# Altium PCB f30bms-slaveboard-tester.PcbDoc
Units mil, origin at the board's own origin, x right, y up, seen from the top; angles counter-clockwise.
Board outline 6000 x 4000 mil, 2 copper layers (Top Layer, Bottom Layer); 67 components, 29 nets, 109 pads, 0 vias.
Unrouted connection lines stored in the file: 11.
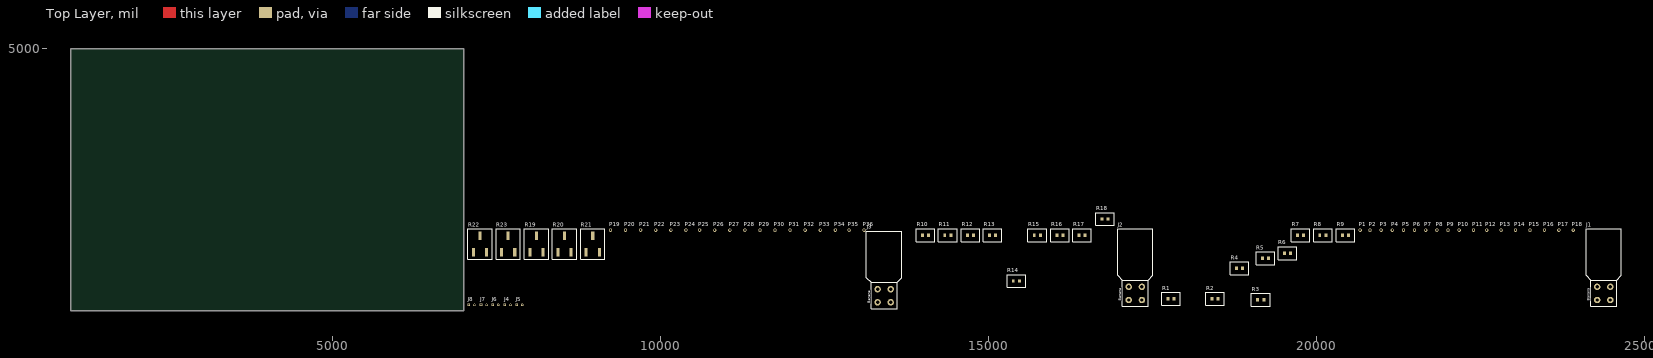
[diagram p0: Top Layer view]
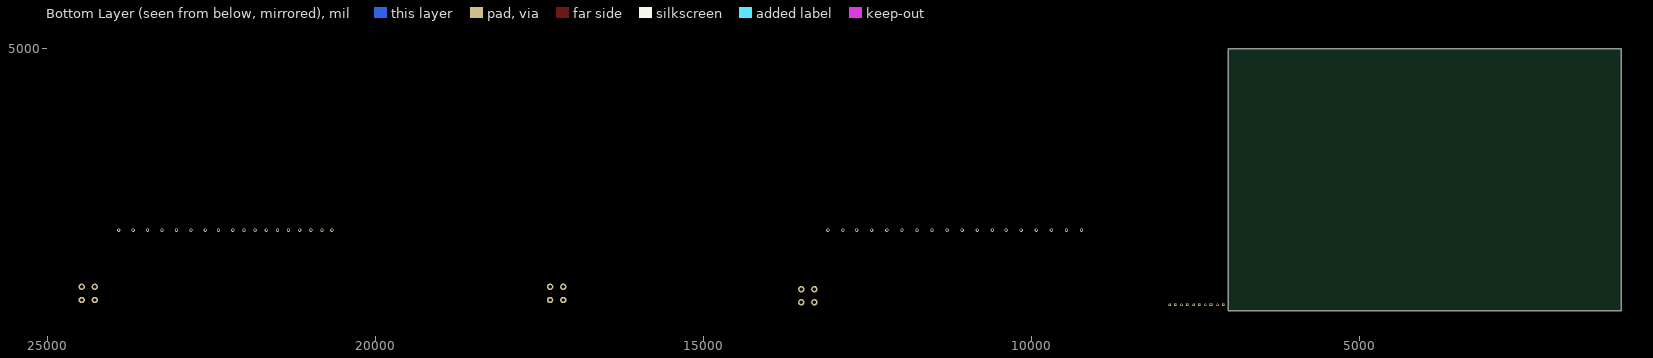
[diagram p1: Bottom Layer view, seen from below]

## Layer stack, top to bottom
Top Solder: solder mask 0.4, Solder Resist, Dk 3.5
Top Layer: signal copper 1.4
Dielectric 1: dielectric 12.6, FR-4, Dk 4.8
Bottom Layer: signal copper 1.4
Bottom Solder: solder mask 0.4, Solder Resist, Dk 3.5

## Board outline
1000,1000 7000,1000 7000,5000 1000,5000

## Design rules (kind name [scope] priority, off if disabled: settings)
Clearance [All] p1: gap=10 ignorepadtopadclearanceinfootprint=FALSE except(0: Arc-Hole Track-Hole SMDPad-Hole THPad-Hole Via-Hole Fill-Hole Poly-Hole Region-Hole Text-Hole)
PolygonConnect [All] p1: connectstyle=Relief reliefconductorwidth=10 reliefentries=4 polygonreliefangle="90 Angle" airgapwidth=10
RoutingVias [All] p1: holewidth=28 width=50 viastyle="Through Hole" minholewidth=28 minwidth=50 maxholewidth=28 maxwidth=50
SolderMaskExpansion [All] p1: expansion=4 istentingtop=FALSE
Width [All] p1: maxlimit=10 minlimit=10 preferedwidth=10
30 further rules are at their usual default settings.

## Components (designator, comment, footprint, x,y, rotation, side; value= is the part's Value field where it differs from the comment)
J1 "CT3151SP-0" banana_socket 24285,1165 r90 top
J2 "CT3151SP-0" banana_socket 17140,1165 r90 top
J3 "CT3151SP-0" banana_socket 13309.21,1129.21 r90 top
J4 "Molex connector" Molex_TTL 7625,1090 r0 top
J5 "Molex connector" Molex_TTL 7805,1090 r0 top
J6 "Molex connector" Molex_TTL 7440,1090 r0 top
J7 "Molex connector" Molex_TTL 7260,1090 r0 top
J8 "Molex connector" Molex_TTL 7075,1090 r0 top
P1 "SLAVEBOARD CONTACT" SLAVEBOARD_CONNECTOR 20670,2230 r0 top
P2 "SLAVEBOARD CONTACT" SLAVEBOARD_CONNECTOR 20820,2230 r0 top
P3 "SLAVEBOARD CONTACT" SLAVEBOARD_CONNECTOR 20990,2230 r0 top
P4 "pad thing" SLAVEBOARD_CONNECTOR 21160,2230 r0 top
P5 "pad thing" SLAVEBOARD_CONNECTOR 21330,2230 r0 top
P6 "pad thing" SLAVEBOARD_CONNECTOR 21500,2230 r0 top
P7 "pad thing" SLAVEBOARD_CONNECTOR 21670,2230 r0 top
P8 "pad thing" SLAVEBOARD_CONNECTOR 21840,2230 r0 top
P9 "SLAVEBOARD CONTACT" SLAVEBOARD_CONNECTOR 22010,2230 r0 top
P10 "pad thing" SLAVEBOARD_CONNECTOR 22180,2230 r90 top
P11 "pad thing" SLAVEBOARD_CONNECTOR 22400,2230 r0 top
P12 "pad thing" SLAVEBOARD_CONNECTOR 22600,2230 r90 top
P13 "pad thing" SLAVEBOARD_CONNECTOR 22820,2230 r90 top
P14 "pad thing" SLAVEBOARD_CONNECTOR 23040,2230 r90 top
P15 "pad thing" SLAVEBOARD_CONNECTOR 23260,2230 r90 top
P16 "pad thing" SLAVEBOARD_CONNECTOR 23480,2230 r90 top
P17 "pad thing" SLAVEBOARD_CONNECTOR 23700,2230 r90 top
P18 "pad thing" SLAVEBOARD_CONNECTOR 23920,2230 r90 top
P19 "pad thing" SLAVEBOARD_CONNECTOR 9235,2230 r90 top
P20 "pad thing" SLAVEBOARD_CONNECTOR 9465,2230 r90 top
P21 "pad thing" SLAVEBOARD_CONNECTOR 9695,2230 r90 top
P22 "pad thing" SLAVEBOARD_CONNECTOR 9925,2230 r90 top
P23 "pad thing" SLAVEBOARD_CONNECTOR 10155,2230 r90 top
P24 "pad thing" SLAVEBOARD_CONNECTOR 10385,2230 r90 top
P25 "pad thing" SLAVEBOARD_CONNECTOR 10595,2230 r90 top
P26 "pad thing" SLAVEBOARD_CONNECTOR 10825,2230 r90 top
P27 "pad thing" SLAVEBOARD_CONNECTOR 11055,2230 r90 top
P28 "pad thing" SLAVEBOARD_CONNECTOR 11285,2230 r90 top
P29 "pad thing" SLAVEBOARD_CONNECTOR 11515,2230 r90 top
P30 "pad thing" SLAVEBOARD_CONNECTOR 11745,2230 r90 top
P31 "pad thing" SLAVEBOARD_CONNECTOR 11975,2230 r90 top
P32 "pad thing" SLAVEBOARD_CONNECTOR 12205,2230 r90 top
P33 "pad thing" SLAVEBOARD_CONNECTOR 12435,2230 r90 top
P34 "pad thing" SLAVEBOARD_CONNECTOR 12665,2230 r90 top
P35 "pad thing" SLAVEBOARD_CONNECTOR 12875,2230 r90 top
P36 "pad thing" SLAVEBOARD_CONNECTOR 13105,2230 r90 top
R1 "1622796-6" "CHP0805-FX-1002ELF - duplicate" 17785,1185 r0 top
R2 "1622796-6" "CHP0805-FX-1002ELF - duplicate" 18455,1185 r0 top
R3 "1622796-6" "CHP0805-FX-1002ELF - duplicate" 19153.74,1170 r0 top
R4 "1622796-6" "CHP0805-FX-1002ELF - duplicate" 18830,1650 r0 top
R5 "1622796-6" "CHP0805-FX-1002ELF - duplicate" 19223.74,1800 r0 top
R6 "1622796-6" "CHP0805-FX-1002ELF - duplicate" 19560,1880 r0 top
R7 "1622796-6" "CHP0805-FX-1002ELF - duplicate" 19760,2155 r0 top
R8 "1622796-6" "CHP0805-FX-1002ELF - duplicate" 20100,2155 r0 top
R9 "1622796-6" "CHP0805-FX-1002ELF - duplicate" 20445,2155 r0 top
R10 "1622796-6" "CHP0805-FX-1002ELF - duplicate" 14040,2155 r0 top
R11 "1622796-6" "CHP0805-FX-1002ELF - duplicate" 14380,2155 r0 top
R12 "1622796-6" "CHP0805-FX-1002ELF - duplicate" 14725,2155 r0 top
R13 "1622796-6" "CHP0805-FX-1002ELF - duplicate" 15065,2155 r0 top
R14 "1622796-6" "CHP0805-FX-1002ELF - duplicate" 15425,1455 r0 top
R15 "1622796-6" "CHP0805-FX-1002ELF - duplicate" 15745,2155 r0 top
R16 "1622796-6" "CHP0805-FX-1002ELF - duplicate" 16090,2155 r0 top
R17 "1622796-6" "CHP0805-FX-1002ELF - duplicate" 16430,2155 r0 top
R18 "1622796-6" "CHP0805-FX-1002ELF - duplicate" 16780,2400 r0 top
R19 "3361P-1-103GLF" 3361P-1-103GLF_SOP3 8000,1995 r0 top
R20 "3361P-1-103GLF" 3361P-1-103GLF_SOP3 8430,1995 r0 top
R21 "3361P-1-103GLF" 3361P-1-103GLF_SOP3 8860,1995 r0 top
R22 "3361P-1-103GLF" 3361P-1-103GLF_SOP3 7140,1995 r0 top
R23 "3361P-1-103GLF" 3361P-1-103GLF_SOP3 7570,1995 r0 top

## Footprints (in the part's own frame and the unit in brackets; to place one, negate y for a bottom-side part, rotate by r counter-clockwise, add the part's x,y. Pads: shape width x height; smd on the part's side, far side on the other; paste and mask are expansions set on the pad)
3361P-1-103GLF_SOP3 [mm]
  rect 1.19x3.3 smd: 21(0.127,-2.667) 21(2.667,3.81) 21(5.207,-2.667)
  silkscreen extent -2.03,-5.33 7.37,6.48
banana_socket [mm]
  round 2.5 hole 1.3: 20(0,0) 20(0,-5.1) 20(5.1,-5.1) 20(5.1,0)
  silkscreen extent -2.5,-9.4 27.56,4.32
"CHP0805-FX-1002ELF - duplicate" [mm]
  rect 1.15x1.3 smd: 1(-1.175,0) 2(1.175,0)
  silkscreen extent -3.6,-2.5 3.6,2.5
Molex_TTL [mm]
  rect 1x1 hole 0.643 paste-2539.97: 1(0,0)
  round 1 hole 0.643 paste-2539.97: 2(2.159,0)
SLAVEBOARD_CONNECTOR [mil]
  round 50 hole 30: 0(0,0)

## Part data
J1 J2 J3: "Conn 4mm Safety Banana Jack F 1 POS Solder RA Thru-Hole 1 Port Bag", Color=Black, Manufacturer="Cal Test Electronics", Max Operating Temperature=80°C, Min Operating Temperature=-20°C, Supplier Part Number 1=BKCT3151SP-0-ND, Body Material=Nylon,Polyamide, Category=Connectors, ComponentLink1Description=http://www.caltestelectronics.com/images/attachments/P315100rH_drawing.pdf?src-supplier=Digi-Key, ComponentLink1URL=http://www.caltestelectronics.com/images/attachments/P315100rH_drawing.pdf?src-supplier=Digi-Key, Contact Material=Brass, Contact Plating=Nickel, Gender=Female, Insulation="Mating End Insulated", Manufacturer Part Number=CT3151SP-0, Mount="Through Hole,Panel", Packaging=Bulk, Pricing 1="1=2.05000 (USD)", RoHS=Yes, Stock 1=6317, Supplier 1=Digi-Key, Termination=Solder
R1 R2 R3 R4 R5 R6 R7 R8 R9 R10 R11 R12 R13 R14 R15 R16 R17 R18: "Res Thin Film 10K Ohm 0.1% 1/4W 15ppm/C Conformal AXL Thru-Hole Ammo Pack", Case/Package=Conformal, Manufacturer="TE Connectivity", Max Operating Temperature=155°C, Max Power Dissipation=250mW, Min Operating Temperature=-65°C, Package Quantity=1000, Resistance=10kR, Resistor Type="Metal Film,Thin Film", Supplier Part Number 1=A105970CT-ND, Temperature Coefficient=15ppm/°C, Tolerance=0.1%, Category="Through-Hole Resistors", ComponentLink1Description=https://datasheet.ciiva.com/8332/eng-ds-1773265-a-8332394.pdf?src-supplier=Avnet, ComponentLink1URL=https://datasheet.ciiva.com/8332/eng-ds-1773265-a-8332394.pdf?src-supplier=Avnet, ComponentLink2Description=https://datasheet.ciiva.com/6532/eng-ds-1773265-a-6532773.pdf?src-supplier=Digi-Key, ComponentLink2URL=https://datasheet.ciiva.com/6532/eng-ds-1773265-a-6532773.pdf?src-supplier=Digi-Key, ComponentLink3Description=https://datasheet.ciiva.com/48735/eng-ds-1773265-a-48735567.pdf?src-supplier=Onlinecomponents.com, ComponentLink3URL=https://datasheet.ciiva.com/48735/eng-ds-1773265-a-48735567.pdf?src-supplier=Onlinecomponents.com, Construction=Cylindrical, Diameter=2.3mm, Length=6.3mm, Manufacturer Part Number=1622796-6, Military Standard=Not, Mount="Through Hole", Number of Terminations=2, Packaging="Tape and Reel", Pricing 1="1=0.60000, 10=0.50300, 25=0.43120, 50=0.38800, 100=0.33780, 250=0.30184, 500=0.24436 (USD)", RoHS=Yes, RoHS Compliant=Yes, Series="YR, Neohm", Stock 1=35957, Supplier 1=Digi-Key, Termination=Axial
R19 R20 R21 R22 R23: "Res Cermet Trimmer 10K Ohm 10% 1/2W 1(Elec)/1(Mech)Turn 2.77mm (6.71 X 8.53 X 5.21mm) Gull Wing SMD Embossed T/R", Color=Natural, Manufacturer=Bourns, Max Operating Temperature=125°C, Max Power Dissipation=500mW, Min Operating Temperature=-55°C, Package Quantity=1, Resistance=10kR, Resistance Tolerance=10%, Resistor Type=Cermet, Supplier Part Number 1=3361P-103GLFCT-ND, Temperature Coefficient=100ppm/°C, Voltage Rating=300V, Category="Variable Resistors and Potentiometers", ComponentLink1Description=https://datasheet.ciiva.com/27747/2033640-27747919.pdf?src-supplier=Jameco, ComponentLink1URL=https://datasheet.ciiva.com/27747/2033640-27747919.pdf?src-supplier=Jameco, ComponentLink2Description=https://datasheet.ciiva.com/11833/0900766b80fe1d0c-11833213.pdf?src-supplier=RSComponents, ComponentLink2URL=https://datasheet.ciiva.com/11833/0900766b80fe1d0c-11833213.pdf?src-supplier=RSComponents, ComponentLink3Description=https://datasheet.ciiva.com/1477/1846252-1477716.pdf?src-supplier=Element14, ComponentLink3URL=https://datasheet.ciiva.com/1477/1846252-1477716.pdf?src-supplier=Element14, ComponentLink4Description=https://datasheet.ciiva.com/1477/1846252-1477717.pdf?src-supplier=Element14, ComponentLink4URL=https://datasheet.ciiva.com/1477/1846252-1477717.pdf?src-supplier=Element14, ComponentLink5Description=https://datasheet.ciiva.com/3266/3361-3266293.pdf?src-supplier=Avnet, ComponentLink5URL=https://datasheet.ciiva.com/3266/3361-3266293.pdf?src-supplier=Avnet, ComponentLink6Description=https://datasheet.ciiva.com/17562/3361-17562095.pdf?src-supplier=Avnet+Europe, ComponentLink6URL=https://datasheet.ciiva.com/17562/3361-17562095.pdf?src-supplier=Avnet+Europe, ComponentLink7Description=https://datasheet.ciiva.com/2156/3361-2156171.pdf?src-supplier=Digi-Key, ComponentLink7URL=https://datasheet.ciiva.com/2156/3361-2156171.pdf?src-supplier=Digi-Key, ComponentLink8Description=https://datasheet.ciiva.com/2156/3361-2156172.pdf?src-supplier=Digi-Key, ComponentLink8URL=https://datasheet.ciiva.com/2156/3361-2156172.pdf?src-supplier=Digi-Key, ComponentLink9Description=https://datasheet.ciiva.com/2156/3361-2156170.pdf?src-supplier=Digi-Key, ComponentLink9URL=https://datasheet.ciiva.com/2156/3361-2156170.pdf?src-supplier=Digi-Key, ComponentLink10Description=https://datasheet.ciiva.com/30200/3361-30200607.pdf?src-supplier=Onlinecomponents.com, ComponentLink10URL=https://datasheet.ciiva.com/30200/3361-30200607.pdf?src-supplier=Onlinecomponents.com, Contact Plating=Tin,Matte, Depth=8.53mm, Height=0.205inch, Lead Free="Lead Free", Length=6.71mm, Manufacturer Part Number=3361P-1-103GLF, Military Standard=Not, Mount="Surface Mount", Number of Turns=1, Packaging="Tape and Reel", Power Rating=500mW, Pricing 1="1=1.26000, 10=1.11000, 25=0.99920, 50=0.96200, 100=0.92500, 250=0.86952 (USD)", Radiation Hardening=No, REACH SVHC="No SVHC", RoHS=Yes, RoHS Compliant=Yes, Series="Trimpot® 3361 - Sealed", Stock 1=14460, Supplier 1=Digi-Key, Taper=Linear, Technology=CERMET, Termination="Gull Wing", Tolerance=10%, Voltage Rating (DC)=300V, Weight=0.567g, Width=0.264inch

## Nets (pads, with @x,y where several pads share a name; then routed paths per layer and width w, separated by ;. In a path a pad name is that pad's centre, name@x,y a point inside that pad or via, vN(x,y) a via of type N, cw(c..) or ccw(c..) an arc to the next point about the centre after c; other vN are vias at no path point)
60V: R1.1
GND: R10.1
NetJ2_4: R9.2 R18.2
NetJ4_1: J4.1
NetJ4_2: J4.2
NetJ5_1: J5.1
NetJ5_2: J5.2
NetJ6_1: J6.1
NetJ6_2: J6.2
NetJ7_1: J7.1
NetJ7_2: J7.2
NetJ8_1: J8.1
NetJ8_2: J8.2
NetP2_*: R1.2 R2.1
NetP4_1: R3.1
NetP6_1: R3.2
NetP8_1: R4.2 R5.1
NetP10_1: R5.2 R6.1
NetP12_1: R6.2 R7.1
NetP14_1: R7.2 R8.1
NetP16_1: R8.2 R9.1
NetP20_1: R11.1
NetP22_1: R12.1
NetP24_1: R12.2
NetP26_1: R13.2 R14.1
NetP28_1: R14.2 R15.1
NetP30_1: R15.2
NetP32_1: R16.2 R17.1
NetP34_1: R17.2 R18.1
pads on no net: J1.20 J2.20 J3.20 P1.0 P2.0 P3.0 P4.0 P5.0 P6.0 P7.0 P8.0 P9.0 P10.0 P11.0 P12.0 P13.0 P14.0 P15.0 P16.0 P17.0 P18.0 P19.0 P20.0 P21.0 P22.0 P23.0 P24.0 P25.0 P26.0 P27.0 P28.0 P29.0 P30.0 P31.0 P32.0 P33.0 P34.0 P35.0 P36.0 R2.2 R4.1 R10.2 R11.2 R13.1 R16.1 R19.21 R20.21 R21.21 R22.21 R23.21

## Text inside footprints (layer, text, board x,y; h text height)
J1: Top Overlay "Banana" at 24172.13,1152.87 h39.37 r90
J2: Top Overlay "Banana" at 17027.13,1152.87 h39.37 r90
J3: Top Overlay "Banana" at 13196.34,1117.09 h39.37 r90